# EAGLE board CT_schematic (EAGLE 7.6.0)

Size 100 x 80 mm. Coordinates in mm from the lower left corner, seen from the top.
Outline: 0,0 100,0 100,80 0,80 0,0
Copper layers (1*16): Top 0.035mm / dielectric 1.5mm / Bottom 0.035mm
Design rules "default": minimum track width 10mil, minimum drill 24mil, track to track 8mil, track to pad 8mil, pad to pad 8mil, via to via 8mil, smd to smd 8mil, copper to edge 40mil, drill to drill 8mil, minimum pad ring 10mil, minimum via ring 8mil, stop-mask expansion 4mil, vias tented up to drill 0mil, thermal gap 10mil

## Footprints (pad centres in the part's own frame; a part is rotated, then mirrored left to right if it is on the bottom)
C0603 = smd 0.8 x 0.8: 1 -0.762,0; 2 0.762,0
C0402 = smd 0.5 x 0.5: 1 -0.508,0; 2 0.508,0
C0805 = smd 1.2 x 1.3: 1 -1.016,0; 2 1.016,0
C1210 = smd 1.2 x 2.5: 1 -1.524,0; 2 1.524,0
EXV-9H = smd 3.505 x 1.676: 1 -2.857,0; 2 2.857,0
L0603 = smd 0.8 x 0.8: 1 -0.762,0; 2 0.762,0
PJ-037B_PACKAGE = drill 3.7 square: 1 12,0 | drill 3.2 square: 2 6,0
R0603 = smd 0.8 x 0.8: 1 -0.762,0; 2 0.762,0
LQFP64 = smd 0.3 x 1.2: 1 -3.75,-5.75; 2 -3.25,-5.75; 3 -2.75,-5.75; 4 -2.25,-5.75; 5 -1.75,-5.75; 6 -1.25,-5.75; 7 -0.75,-5.75; 8 -0.25,-5.75; 9 0.25,-5.75; 10 0.75,-5.75; 11 1.25,-5.75; 12 1.75,-5.75; 13 2.25,-5.75; 14 2.75,-5.75; 15 3.25,-5.75; 16 3.75,-5.75; 33 3.75,5.75; 34 3.25,5.75; 35 2.75,5.75; 36 2.25,5.75; 37 1.75,5.75; 38 1.25,5.75; 39 0.75,5.75; 40 0.25,5.75; 41 -0.25,5.75; 42 -0.75,5.75; 43 -1.25,5.75; 44 -1.75,5.75; 45 -2.25,5.75; 46 -2.75,5.75; 47 -3.25,5.75; 48 -3.75,5.75 | smd 1.2 x 0.3: 17 5.75,-3.75; 18 5.75,-3.25; 19 5.75,-2.75; 20 5.75,-2.25; 21 5.75,-1.75; 22 5.75,-1.25; 23 5.75,-0.75; 24 5.75,-0.25; 25 5.75,0.25; 26 5.75,0.75; 27 5.75,1.25; 28 5.75,1.75; 29 5.75,2.25; 30 5.75,2.75; 31 5.75,3.25; 32 5.75,3.75; 49 -5.75,3.75; 50 -5.75,3.25; 51 -5.75,2.75; 52 -5.75,2.25; 53 -5.75,1.75; 54 -5.75,1.25; 55 -5.75,0.75; 56 -5.75,0.25; 57 -5.75,-0.25; 58 -5.75,-0.75; 59 -5.75,-1.25; 60 -5.75,-1.75; 61 -5.75,-2.25; 62 -5.75,-2.75; 63 -5.75,-3.25; 64 -5.75,-3.75
M10382 = smd 1 x 1: 1 0,0; 2 -1.6,0; 3 -3.2,0; 4 -3.2,-2; 5 -3.2,-3.6; 6 -3.2,-5.2; 7 -3.2,-6.8; 8 -3.2,-8.4; 9 -3.2,-10; 10 -3.2,-11.6; 11 -3.2,-13.2; 12 -3.2,-14.8; 13 -3.2,-16.4; 14 -3.2,-18; 15 -3.2,-19.6; 16 -3.2,-21.2; 17 -3.2,-22.8; 18 -0.55,-22.8; 19 1.05,-22.8; 20 2.65,-22.8; 21 5.3,-22.8; 22 5.3,-21.2; 23 5.3,-19.6; 24 5.3,-18; 25 5.3,-16.4; 26 5.3,-14.8; 27 5.3,-13.2; 28 5.3,-11.6; 29 5.3,-10; 30 5.3,-8.4; 31 5.3,-6.8; 32 5.3,-5.2; 33 5.3,-3.6; 34 5.3,-2; 35 5.3,0; 36 3.7,0
M41T65_QFN-16 = smd 0.775 x 0.305: 1 -1.387,0.75; 2 -1.387,0.25; 3 -1.387,-0.25; 4 -1.387,-0.75; 9 1.387,-0.75; 10 1.387,-0.25; 11 1.387,0.25; 12 1.387,0.75 | smd 0.305 x 0.775: 5 -0.75,-1.387; 6 -0.25,-1.387; 7 0.25,-1.387; 8 0.75,-1.387; 13 0.75,1.387; 14 0.25,1.387; 15 -0.25,1.387; 16 -0.75,1.387 | smd 1.6 x 1.6: 17 0,0
XCVR_SPBTLE-RF = smd 1.6 x 1: 1 -6.75,0.33; 2 -6.75,-0.94; 3 -6.75,-2.21; 4 -6.75,-3.48; 5 -6.75,-4.75; 7 6.75,-4.75; 8 6.75,-3.48; 9 6.75,-2.21; 10 6.75,-0.94; 11 6.75,0.33 | smd 1 x 1.6: 6 -2.75,-5.75
QFN-28 = smd 0.813 x 0.305: 1 -2.451,1.5; 2 -2.451,1; 3 -2.451,0.5; 4 -2.451,0; 5 -2.451,-0.5; 6 -2.451,-1; 7 -2.451,-1.5; 15 2.451,-1.5; 16 2.451,-1; 17 2.451,-0.5; 18 2.451,0; 19 2.451,0.5; 20 2.451,1; 21 2.451,1.5 | smd 0.305 x 0.813: 8 -1.5,-2.451; 9 -1,-2.451; 10 -0.5,-2.451; 11 0,-2.451; 12 0.5,-2.451; 13 1,-2.451; 14 1.5,-2.451; 22 1.5,2.451; 23 1,2.451; 24 0.5,2.451; 25 0,2.451; 26 -0.5,2.451; 27 -1,2.451; 28 -1.5,2.451 | smd 3.607 x 3.607: 29 0,0
SJ-43515TS-SMT-TR = smd 2.2 x 3: 1 0.6,-7.4; 4 3.4,-7.4 | smd 3 x 3: 2 12.8,-7.4; 5 17,-3 | smd 2 x 3: 3 5.3,0; 6 2.5,0 | drill 1.8: P$7 4.5,-3.69; P$8 11.54,-3.69
ABS07-32.768KHZ-7-T = smd 1.1 x 2.4: 1 -2.5,0; 2 0,0
ABLS-12.288MHZ-B4-T = smd 5.6 x 2.8: 1 -3.81,0; 2 5.69,0
ASFL1 = smd 1.7 x 1.5: 1 -1.27,-1.1; 2 1.27,-1.1; 3 1.27,1.1; 4 -1.27,1.1
WSON-8 = smd 0.3 x 0.6: 1 -0.75,0; 2 0.05,0; 3 0.85,0; 4 1.65,0; 5 1.65,3.8; 6 0.85,3.8; 7 0.05,3.8; 8 -0.75,3.8 | smd 3 x 2.6: PAD 0.45,1.9
SON-6 = smd 0.55 x 0.3: 1 -0.355,0.5 | smd 0.52 x 0.3: 2 -0.37,0; 3 -0.37,-0.5; 4 0.37,-0.5; 5 0.37,0; 6 0.37,0.5
SW_4-1437565-2 = smd 1.4 x 2.1: 1 -2.23,4.55; 2 -2.23,-4.55; 3 2.23,4.55; 4 2.23,-4.55
LGM67K-G1J2-24-Z = smd 0.8 x 1.4: A -2,0; C 0,0
NC7SZ125M5X = smd 1.3 x 0.7: 1 -1.3,0.95; 2 -1.3,0; 3 -1.3,-0.95; 4 1.3,-0.95; 5 1.3,0.95
DUMMY_PACKAGE_180 = drill 0.3: 1 0,-1; 2 1.5,-1; 3 3,-1

## Placement (x,y rotation side)
C1  1e-06  [C0603]  -63.5,77.47 0 top  (outside the outline)
C2  1e-07  [C0603]  -67.31,77.47 0 top  (outside the outline)
C3  1e-07  [C0603]  -71.12,77.47 0 top  (outside the outline)
C4  1e-07  [C0603]  -74.93,77.47 0 top  (outside the outline)
C5  1e-07  [C0603]  -78.74,77.47 0 top  (outside the outline)
C6  1e-07  [C0603]  -15.24,82.55 0 top  (outside the outline)
C7  4.7e-06  [C0603]  -59.69,77.47 0 top  (outside the outline)
C8  1e-08  [C0603]  -19.05,82.55 0 top  (outside the outline)
C9  1e-06  [C0603]  -22.86,82.55 0 top  (outside the outline)
C10  1e-11  [C0402]  -26.67,87.63 0 top  (outside the outline)
C11  1e-11  [C0402]  -30.48,87.63 0 top  (outside the outline)
C12  2.2e-11  [C0402]  -77.47,82.55 0 top  (outside the outline)
C13  2.2e-11  [C0402]  -15.24,87.63 0 top  (outside the outline)
C14  4.7e-06  [C0805]  -27.94,71.12 0 top  (outside the outline)
C15  1e-06  [C0603]  -26.67,82.55 0 top  (outside the outline)
C16  1e-07  [C0402]  -34.29,87.63 0 top  (outside the outline)
C17  2.2e-05  [C1210]  -57.15,64.77 0 top  (outside the outline)
C18  2.2e-05  [C1210]  -63.5,64.77 0 top  (outside the outline)
C19  1e-09  [C0402]  -38.1,87.63 0 top  (outside the outline)
C20  1e-09  [C0402]  -41.91,87.63 0 top  (outside the outline)
C21  1e-07  [C0402]  -45.72,87.63 0 top  (outside the outline)
C22  1e-07  [C0402]  -49.53,87.63 0 top  (outside the outline)
C23  1e-07  [C0402]  -53.34,87.63 0 top  (outside the outline)
C24  1e-07  [C0402]  -57.15,87.63 0 top  (outside the outline)
C25  1e-07  [C0402]  -60.96,87.63 0 top  (outside the outline)
C26  1e-05  [C0805]  -33.02,71.12 0 top  (outside the outline)
C27  1e-05  [C0805]  -38.1,71.12 0 top  (outside the outline)
C28  1e-05  [C0805]  -43.18,71.12 0 top  (outside the outline)
C29  1e-05  [C0805]  -48.26,71.12 0 top  (outside the outline)
C30  1e-05  [C0805]  -53.34,71.12 0 top  (outside the outline)
C31  2.2e-11  [C0402]  -19.05,87.63 0 top  (outside the outline)
C32  2.2e-11  [C0402]  -22.86,87.63 0 top  (outside the outline)
C33  1e-08  [C0402]  -64.77,87.63 0 top  (outside the outline)
C34  1e-08  [C0402]  -68.58,87.63 0 top  (outside the outline)
C35  1e-05  [C1210]  -69.85,64.77 0 top  (outside the outline)
C36  1e-05  [C1210]  -76.2,64.77 0 top  (outside the outline)
C37  1e-07  [C0402]  -72.39,87.63 0 top  (outside the outline)
C38  0.0001  [EXV-9H]  -74.93,44.45 0 top  (outside the outline)
C39  0.0001  [EXV-9H]  -17.78,57.15 0 top  (outside the outline)
C40  1e-08  [C0402]  -76.2,87.63 0 top  (outside the outline)
C41  1e-08  [C0402]  -15.24,92.71 0 top  (outside the outline)
F1  240.0  [L0603]  -30.48,82.55 0 top  (outside the outline)
J1  PJ-037B  [PJ-037B_PACKAGE]  -55.88,33.02 0 top  (outside the outline)
R2  1000.0  [R0603]  -34.29,82.55 0 top  (outside the outline)
R4  4700.0  [R0603]  -38.1,82.55 0 top  (outside the outline)
R5  4700.0  [R0603]  -41.91,82.55 0 top  (outside the outline)
R6  2200.0  [R0603]  -45.72,82.55 0 top  (outside the outline)
R7  2200.0  [R0603]  -49.53,82.55 0 top  (outside the outline)
R8  2200.0  [R0603]  -53.34,82.55 0 top  (outside the outline)
R9  2200.0  [R0603]  -57.15,82.55 0 top  (outside the outline)
R10  10000.0  [R0603]  -78.74,71.12 0 top  (outside the outline)
R11  10000.0  [R0603]  -15.24,77.47 0 top  (outside the outline)
R12  10000.0  [R0603]  -20.32,77.47 0 top  (outside the outline)
R13  10000.0  [R0603]  -25.4,77.47 0 top  (outside the outline)
R14  100000.0  [R0603]  -58.42,71.12 0 top  (outside the outline)
R15  47000.0  [R0603]  -30.48,77.47 0 top  (outside the outline)
R16  47000.0  [R0603]  -35.56,77.47 0 top  (outside the outline)
R17  47000.0  [R0603]  -40.64,77.47 0 top  (outside the outline)
R18  47000.0  [R0603]  -45.72,77.47 0 top  (outside the outline)
R19  680.0  [R0603]  -60.96,82.55 0 top  (outside the outline)
R20  100000.0  [R0603]  -63.5,71.12 0 top  (outside the outline)
R21  2231.0  [R0603]  -64.77,82.55 0 top  (outside the outline)
R22  1000.0  [R0603]  -68.58,82.55 0 top  (outside the outline)
R23  10000.0  [R0603]  -50.8,77.47 0 top  (outside the outline)
R24  10000.0  [R0603]  -55.88,77.47 0 top  (outside the outline)
R25  9100.0  [R0603]  -72.39,82.55 0 top  (outside the outline)
R26  680000.0  [R0603]  -68.58,71.12 0 top  (outside the outline)
R27  120000.0  [R0603]  -73.66,71.12 0 top  (outside the outline)
U1  STM32F302RDT7  [LQFP64]  -68.58,33.02 0 top  (outside the outline)
U2  M10382  [M10382]  -19.05,24.13 0 top  (outside the outline)
U3  M41T65Q6F  [M41T65_QFN-16]  -20.32,92.71 0 top  (outside the outline)
U4  SPBTLE-RF  [XCVR_SPBTLE-RF]  -31.75,10.16 0 top  (outside the outline)
U5  WM8731CLSEFL  [QFN-28]  -49.53,64.77 0 top  (outside the outline)
U6  SJ-43515TS-SMT-TR  [SJ-43515TS-SMT-TR]  -66.04,10.16 0 top  (outside the outline)
U7  SJ-43515TS-SMT-TR  [SJ-43515TS-SMT-TR]  -39.37,35.56 0 top  (outside the outline)
U8  ABS07-32.768KHZ-7-T  [ABS07-32.768KHZ-7-T]  -58.42,57.15 0 top  (outside the outline)
U9  ABS07-32.768KHZ-7-T  [ABS07-32.768KHZ-7-T]  -27.94,64.77 0 top  (outside the outline)
U10  ABLS-12.288MHZ-B4-T  [ABLS-12.288MHZ-B4-T]  -35.56,57.15 0 top  (outside the outline)
U11  ASFL1-25MHZ-NCS  [ASFL1]  -66.04,45.72 0 top  (outside the outline)
U12  LP3878SDX-ADJ/NOPB  [WSON-8]  -49.53,43.18 0 top  (outside the outline)
U13  TPS3895ADRYR  [SON-6]  -31.75,91.44 0 top  (outside the outline)
U14  4-1437565-2  [SW_4-1437565-2]  -27.94,46.99 0 top  (outside the outline)
U15  Q65110A2395  [LGM67K-G1J2-24-Z]  -36.83,64.77 0 top  (outside the outline)
U16  nc7sz125m5x  [NC7SZ125M5X]  -15.24,71.12 0 top  (outside the outline)
U17  nc7sz125m5x  [NC7SZ125M5X]  -21.59,71.12 0 top  (outside the outline)
U18  Dummy  [DUMMY_PACKAGE_180]  -29.21,92.71 0 top  (outside the outline)

## Library data of the parts
C1-C41 F1 J1 R2 R4-R27 U1-U18 = circuit_tree

## Nets
CLK_CRYSTAL_U1_3: C10.1 U1.3 U9.1
CLK_CRYSTAL_U1_4: C11.1 U1.4 U9.2
CLK_CRYSTAL_U3_1: U3.1 U8.1
CLK_CRYSTAL_U3_2: U3.2 U8.2
CLK_CRYSTAL_U5_1: C31.1 U5.1 U10.1
CLK_CRYSTAL_U5_2: C32.1 U5.2 U10.2
CLK_U1_5: U1.5 U11.3
GND: C1.2 C2.2 C3.2 C4.2 C5.2 C6.2 C7.2 C8.2 C9.2 C10.2 C11.2 C12.2 C13.2 C14.2 C15.2 C16.2 C20.2 C21.2 C22.2 C23.2 C24.2 C25.2 C26.2 C27.2 C28.2 C29.2 C30.2 C31.2 C32.2 C33.2 C34.2 C35.2 C36.2 C37.2 C38.2 C39.2 C40.2 C41.2 J1.2 R2.2 R10.2 R14.2 R15.2 R16.2 R17.2 R18.2 R22.2 R25.2 R27.2 U1.12 U1.18 U1.31 U1.47 U1.63 U2.2 U2.4 U2.14 U2.17 U2.21 U2.24 U2.26 U2.28 U2.33 U2.34 U2.35 U2.36 U3.3 U3.5 U3.17 U4.6 U5.4 U5.15 U5.19 U5.25 U5.26 U5.29 U6.1 U7.1 U11.2 U12.3 U12.PAD U13.2 U15.C U16.1 U16.3 U17.1 U17.3 U18.1
NET_U1_7: R5.1 U1.7 U17.4
NET_U1_13: C8.1 C9.1 F1.1 U1.13
NET_U1_42: R8.1 U1.42 U3.10
NET_U1_43: R9.1 U1.43 U3.9
NET_U1_49: R7.1 U1.49 U2.18
NET_U1_50: R6.1 U1.50 U2.19
NET_U1_60: R10.1 U1.60
NET_U1_61: U15.A
NET_U1_62: U14.3 U14.4
NET_U3_4: R11.1 U3.4
NET_U3_11: R12.1 U3.11
NET_U4_11: R4.1 U4.11 U16.4
NET_U5_9: U5.9
NET_U5_20: C25.1 C30.1 U5.20
NET_U6_2: C18.1 R17.1 U6.2
NET_U6_5: C17.1 R16.1 U6.5
NET_U6_13: C17.2
NET_U6_14: C18.2
NET_U7_5: C19.1 C20.1 R18.1 R19.1 U7.5
NET_U7_21: R19.2
NET_U7_22: C19.2
NET_U12_1: C34.1 U12.1
NET_U12_6: R21.2 R22.1 U12.6
NET_U12_8: R20.1 U12.8
NET_U13_1: R24.1 R25.1 U13.1
NET_U13_3: R26.2 R27.1 U13.3
NET_U13_4: R23.1 U13.4 U16.2 U17.2
NET_U14_1: R2.1 U14.1 U14.2
PROC_GPIO_TO_U4_SPI_IRQ: R15.1 U1.2 U4.4
PROC_I2S2_CK: U1.6 U5.7
PROC_I2S2_EXT_SD: U1.35 U5.10
PROC_I2S2_SD: U1.36 U5.8
PROC_I2S2_WS: U1.33 U5.9 U5.11
PROC_PC0: U1.8 U18.2
PROC_PC1: U1.9 U18.3
PROC_SPI1_MISO: U1.22 U4.8
PROC_SPI1_MOSI: U1.23 U4.9
PROC_SPI1_NSS: R13.1 U1.20 U4.10
PROC_SPI1_SCK: R14.1 U1.21 U4.7
VCC_S1_15V0: C35.1 C38.1 C39.1 J1.1 R20.2 U12.4
VCC_TIER1_3V3: C1.1 C2.1 C3.1 C4.1 C5.1 C6.1 C7.1 C12.1 C13.1 C14.1 C15.1 C16.1 C21.1 C22.1 C23.1 C24.1 C26.1 C27.1 C28.1 C29.1 C33.1 C36.1 C37.1 C40.1 C41.1 F1.2 R4.2 R5.2 R6.2 R7.2 R8.2 R9.2 R11.2 R12.2 R13.2 R21.1 R23.2 R24.2 R26.1 U1.1 U1.19 U1.32 U1.48 U1.64 U2.5 U2.25 U2.27 U3.14 U4.5 U5.3 U5.5 U5.12 U5.18 U11.4 U12.5 U13.6 U16.5 U17.5

## Tracks (layer width: path | path; a pad name or v marks a point on that pad's centre or on a via)
CLK_CRYSTAL_U1_3  (2 unrouted)
CLK_CRYSTAL_U1_4  (2 unrouted)
CLK_CRYSTAL_U3_1  (1 unrouted)
CLK_CRYSTAL_U3_2  (1 unrouted)
CLK_CRYSTAL_U5_1  (2 unrouted)
CLK_CRYSTAL_U5_2  (2 unrouted)
CLK_U1_5  (1 unrouted)
GND  (87 unrouted)
NET_U1_7  (2 unrouted)
NET_U1_13  (3 unrouted)
NET_U1_42  (2 unrouted)
NET_U1_43  (2 unrouted)
NET_U1_49  (2 unrouted)
NET_U1_50  (2 unrouted)
NET_U1_60  (1 unrouted)
NET_U1_62  (1 unrouted)
NET_U3_4  (1 unrouted)
NET_U3_11  (1 unrouted)
NET_U4_11  (2 unrouted)
NET_U5_20  (2 unrouted)
NET_U6_2  (2 unrouted)
NET_U6_5  (2 unrouted)
NET_U7_5  (4 unrouted)
NET_U12_1  (1 unrouted)
NET_U12_6  (2 unrouted)
NET_U12_8  (1 unrouted)
NET_U13_1  (2 unrouted)
NET_U13_3  (2 unrouted)
NET_U13_4  (3 unrouted)
NET_U14_1  (2 unrouted)
PROC_GPIO_TO_U4_SPI_IRQ  (2 unrouted)
PROC_I2S2_CK  (1 unrouted)
PROC_I2S2_EXT_SD  (1 unrouted)
PROC_I2S2_SD  (1 unrouted)
PROC_I2S2_WS  (2 unrouted)
PROC_PC0  (1 unrouted)
PROC_PC1  (1 unrouted)
PROC_SPI1_MISO  (1 unrouted)
PROC_SPI1_MOSI  (1 unrouted)
PROC_SPI1_NSS  (2 unrouted)
PROC_SPI1_SCK  (2 unrouted)
VCC_S1_15V0  (5 unrouted)
VCC_TIER1_3V3  (57 unrouted)